# EAGLE board Handle 2019 - Teensy (EAGLE 9.3.1)
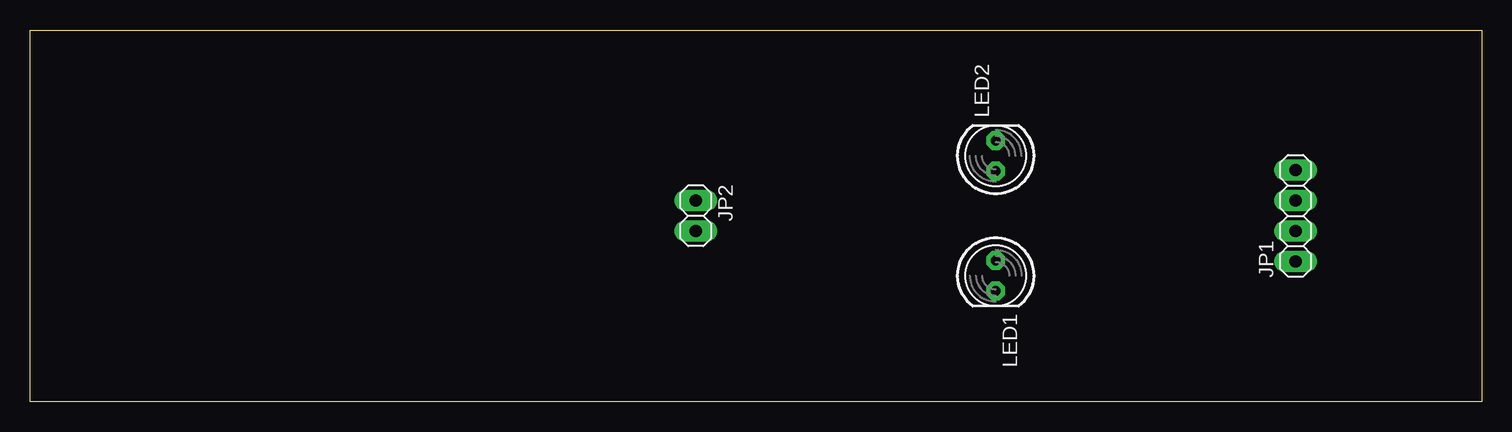
[diagram p0: board, top side]
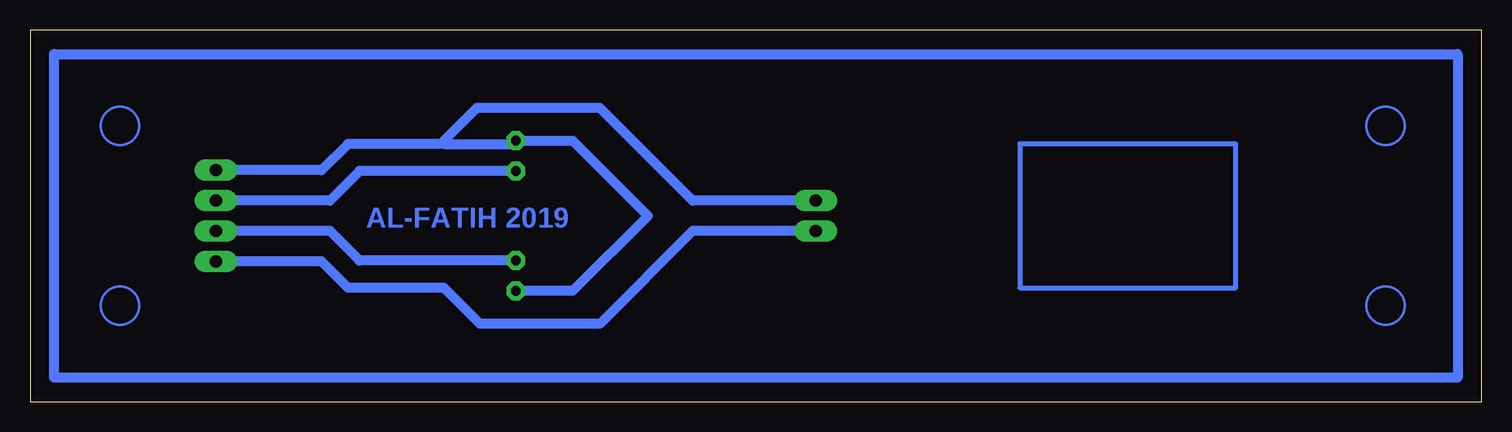
[diagram p1: board, bottom side, seen from below]

Size 121 x 31 mm. Coordinates in mm from the lower left corner, seen from the top.
Outline: 0,31 121,31 121,0 0,0 0,31
Copper layers (1*16): Top 0.035mm / dielectric 1.5mm / Bottom 0.035mm
Design rules "default *": minimum track width 6mil, minimum drill 0.35mm, track to track 6mil, track to pad 6mil, pad to pad 6mil, via to via 6mil, smd to smd 6mil, copper to edge 40mil, drill to drill 6mil, minimum pad ring 15mil, minimum via ring 8mil, stop-mask expansion 4mil, vias tented up to drill 0mil, thermal gap 10mil

## Footprints (pad centres in the part's own frame; a part is rotated, then mirrored left to right if it is on the bottom)
1X04 = drill 1.016 long: 1 -3.81,0; 2 -1.27,0; 3 1.27,0; 4 3.81,0
1X02 = drill 1.016 long: 1 -1.27,0; 2 1.27,0
LED5MM = drill 0.813 octagon: A -1.27,0; K 1.27,0

## Placement (x,y rotation side)
JP1  [1X04]  105.5,15.5 90 top
JP2  [1X02]  55.5,15.5 270 top
LED1  [LED5MM]  80.5,10.5 270 top
LED2  [LED5MM]  80.5,20.5 90 top

## Library data of the parts
JP1 JP2 = pinhead
LED1 LED2 = led

## Nets
GND: JP1.4 JP2.1 LED1.K LED2.K
LED1: JP1.2 LED1.A
LED2: JP1.3 LED2.A
N$1: JP1.1 JP2.2

## Tracks (layer width: path | path; a pad name or v marks a point on that pad's centre or on a via)
GND
  Bottom 0.813: JP2.1 65.77,16.77 73.5,24.5 83.77,24.5 86.5,21.77 86.5,21.5 | 86.5,21.5 80.77,21.5 LED2.K 75.77,21.77 69.5,15.5 75.77,9.23 LED1.K | 86.5,21.5 94.5,21.5 96.69,19.31 JP1.4
LED1
  Bottom 0.813: JP1.2 96,14.23 93.54,11.77 LED1.A
LED2
  Bottom 0.813: JP1.3 96,16.77 93.54,19.23 LED2.A
N$1
  Bottom 0.813: JP2.2 65.77,14.23 73.5,6.5 83.5,6.5 86.5,9.5 94.5,9.5 96.69,11.69 JP1.1
N$3
  Bottom 0.406: 20.5,21.5 38.5,21.5 38.5,9.5 20.5,9.5 20.5,21.5
N$4
  Bottom 0.813: 2,29 2,2 119,2 119,29 2,29
(copper drawn outside any net)
  shapes: Bottom circle x4

## Text on the board
Bottom: AL-FATIH 2019